# Allegro board F103CxT6MiniBoard.brd
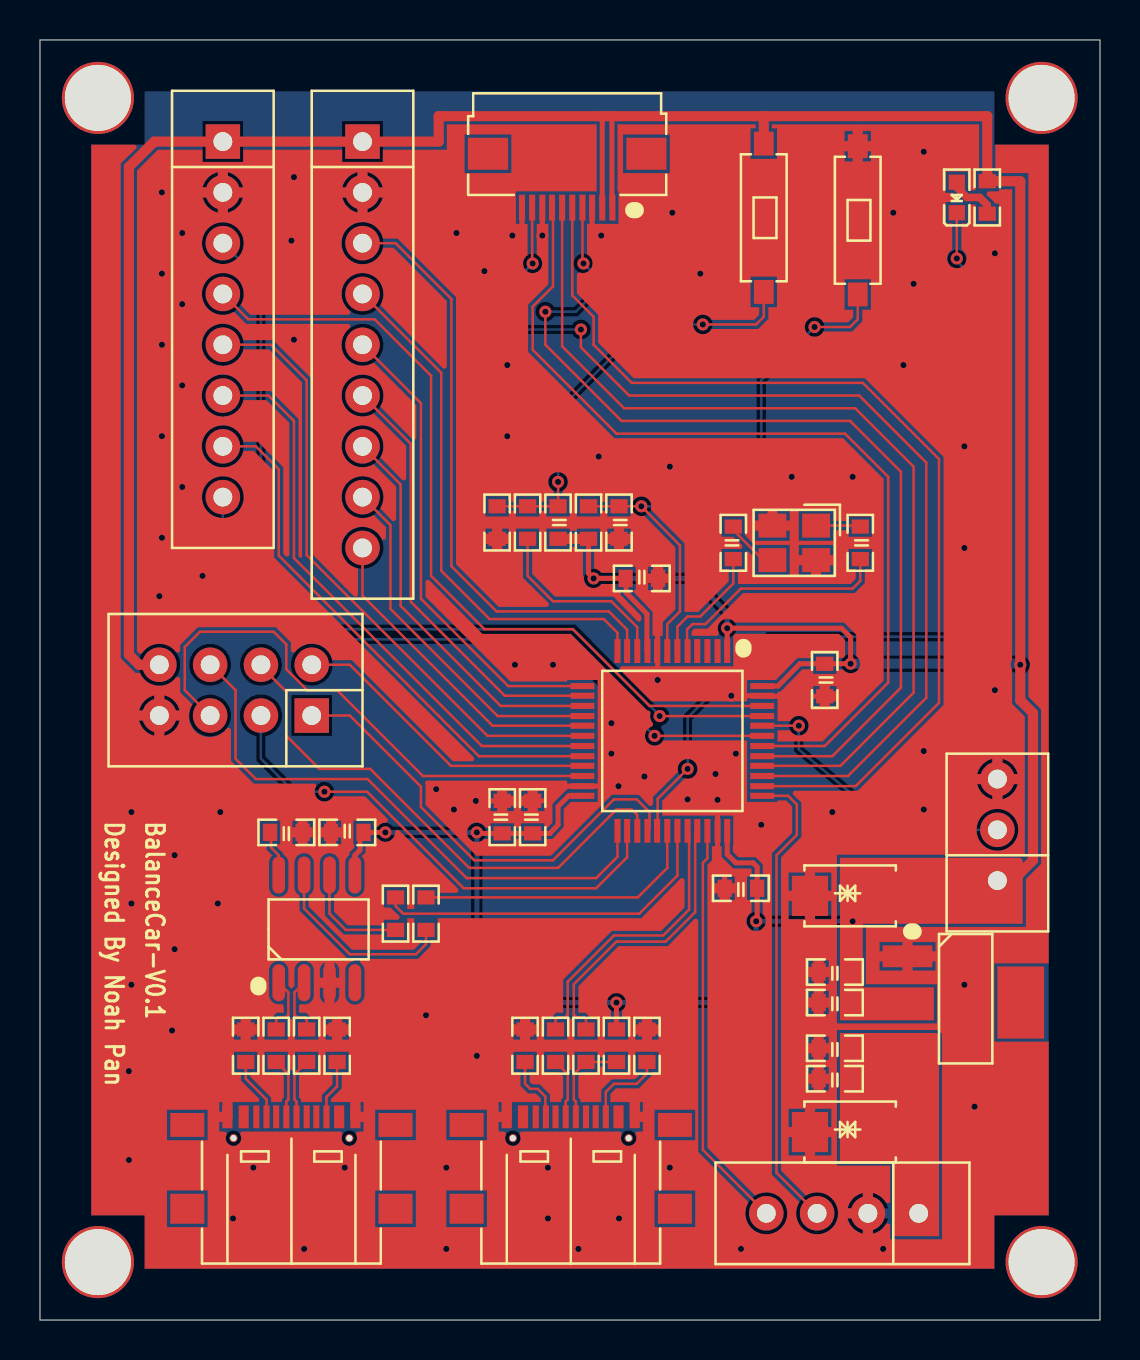
[diagram p0: board, top side]
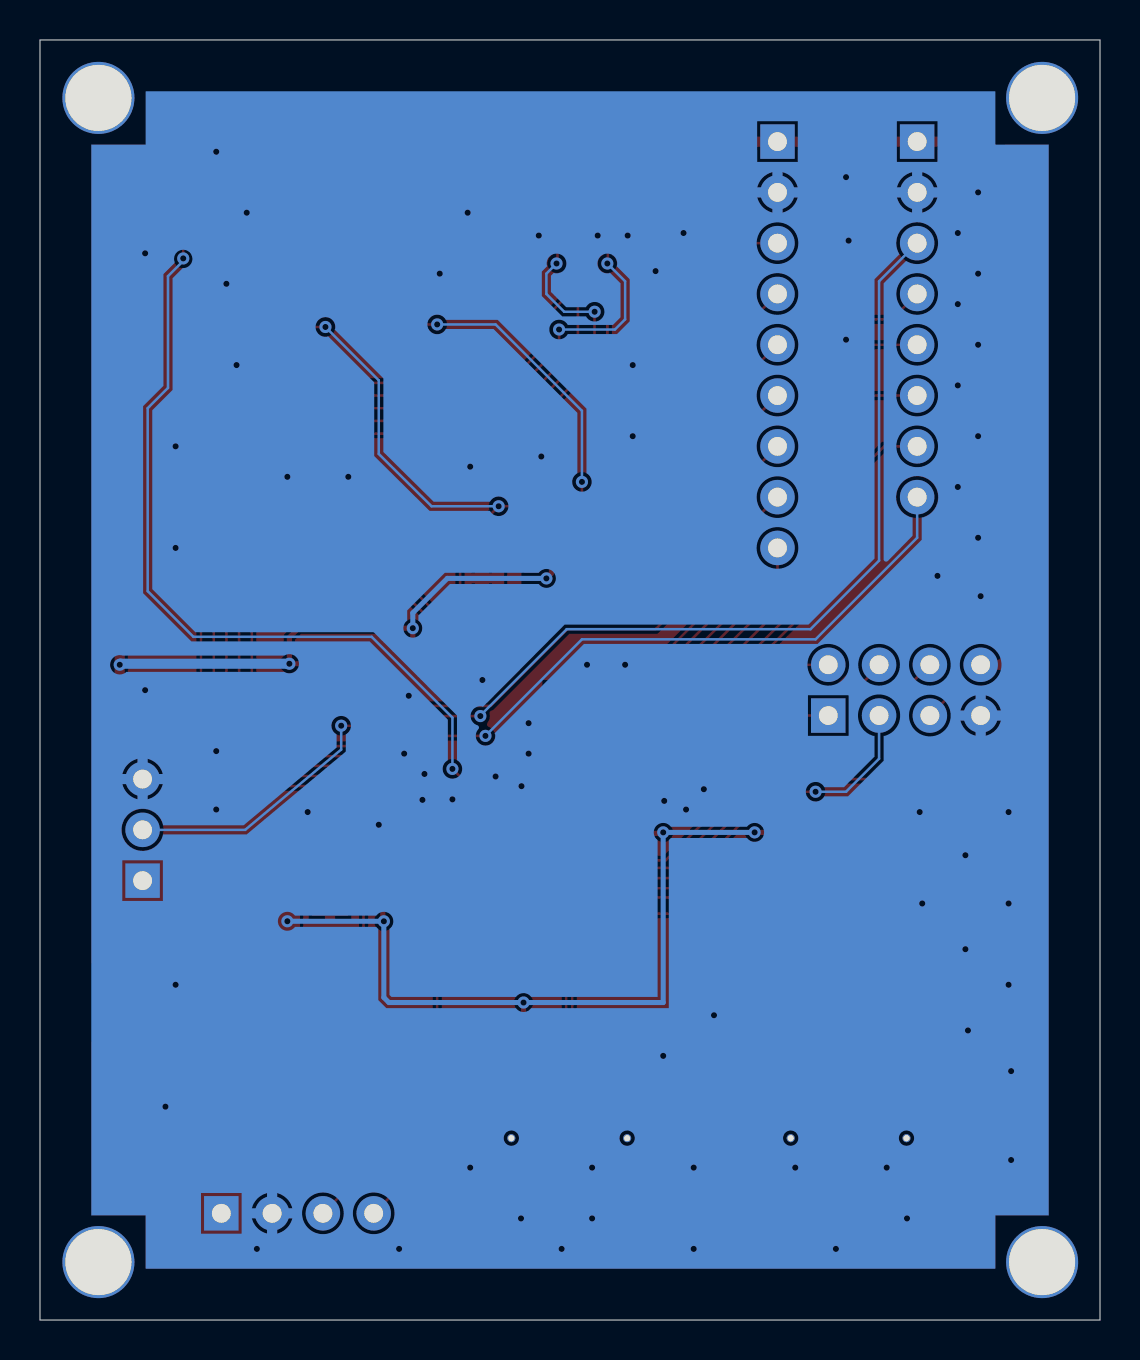
[diagram p1: board, bottom side, seen from below]

Outline 53.01 x 64.01 mm; copper layers: TOP, BOTTOM. Coordinates in mm from the lower left corner of the outline.
Outline path: 0,64.01 0,0 53.01,0 53.01,64.01 0,64.01

## Design rules (mm)
net group PA11: nets PA11 USB2_DM
net group PA12: nets PA12 USB2_DP
net group USB1_DM: nets N118345 USB1_DM
net group USB1_DP: nets N118343 USB1_DP
net group POWER: nets 3V3 5V GND

## Placement (name value [footprint] x y rotation side)
C1  100nF  [C0603]  15.37 24.38 180 top
C2  100nF  [C0603]  39.75 13.59 0 top
C3  10uF  [C0603]  39.75 12.06 0 top
C4  100nF  [C0603]  12.32 24.38 0 top
C5  10uF  [C0603]  39.75 17.4 0 top
C6  100nF  [C0603]  39.75 15.88 0 top
C9  22pF  [C0603]  34.67 38.86 270 top
C10  22pF  [C0603]  41.02 38.86 90 top
C11  100nF  [C0603]  35.05 21.59 0 top
C12  100nF  [C0603]  39.24 32 90 top
C13  100nF  [C0603]  23.11 25.15 270 top
C14  100nF  [C0603]  30.1 37.08 180 top
C15  4.7uF  [C0603]  24.64 25.15 270 top
C17  100nF  [C0603]  25.91 39.88 90 top
C18  100nF  [C0603]  28.96 39.88 90 top
D1  DIODE  [ESD5V0-SOD-323]  40.51 9.4 0 top
D2  DIODE  [ESD3V3-SOD-323]  40.51 21.21 0 top
J1  MPU6050-8P  [CON8-2R54]  9.14 58.93 270 top
J2  SWD-4P  [CON4-2R54]  43.94 5.33 180 top
J3  HEADER 9  [CON9-2R54]  16.13 58.93 270 top
J4  NRF24L01-8P  [CON4X2-2R54]  13.59 30.23 180 top
J5  HEADER 3  [CON3-2R54]  47.88 21.97 90 top
JUMP1  JUMPER  [R0603]  19.3 20.32 90 top
JUMP2  JUMPER  [R0603]  17.78 20.32 90 top
LCD1  LCD_SPI_10P  [FPC10-0R50]  26.37 55.63 180 top
LED2  BLUE  [LED0603]  45.85 56.13 90 top
NOREF  -  []  0 0 0 top
NOREF#2  -  [unnamed#2]  2.9 61.11 0 top
NOREF#3  -  [unnamed#2]  50.09 61.11 0 top
NOREF#4  -  []  53.01 0 90 top
NOREF#5  -  [unnamed#2]  2.9 2.9 0 top
NOREF#6  -  [unnamed#2]  50.09 2.9 0 top
R1  5.1K  [R0603]  14.86 13.72 90 top
R2  5.1K  [R0603]  10.29 13.72 90 top
R3  22R  [R0603]  11.81 13.72 90 top
R4  22R  [R0603]  13.34 13.72 90 top
R6  5.1K  [R0603]  30.35 13.72 90 top
R7  5.1K  [R0603]  24.26 13.72 90 top
R8  22R  [R0603]  28.83 13.72 90 top
R9  22R  [R0603]  25.78 13.72 90 top
R10  22R  [R0603]  27.3 13.72 90 top
R15  1K  [R0603]  24.38 39.88 270 top
R17  1.5K  [R0603]  47.37 56.13 270 top
R18  1K  [R0603]  22.86 39.88 270 top
R19  10K  [R0603]  27.43 39.88 270 top
SW3  BUTTON  [BUTTON-6R00X3R60]  36.2 55.12 90 top
SW4  BUTTON  [BUTTON-6R00X3R60]  40.89 54.99 90 top
U1  CH340N  [CH340N-SOP-8]  11.94 19.56 0 top
U3  STM32F103CBT6  [ST-LQFP-48]  31.62 28.96 270 top
U4  AMS1117  [AMS1117-SOT-223]  46.35 15.88 180 top
USB1  TYPE_C  [USB-C-16-SOCKET]  12.57 10.16 0 top
USB2  TYPE_C  [USB-C-16-SOCKET]  26.54 10.16 0 top
Y1  8MHz  [CRYSTAL-3225]  37.72 38.86 180 top

## Library data of the parts
C1-C6 C9-C15 C17 C18 = CAP
D1 D2 = DIODE_ZENER
J1 = HEADER 8
J2 = HEADER 4
J3 = HEADER 9
J4 = HEADER 4X2
J5 = HEADER 3
JUMP1 JUMP2 = JUMPER
LCD1 = LCD_SPI_10P
LED2 = LED
R1 R2 R6-R8 R15 R17-R19 = RES
R3 R4 R9 R10 = RES: signal model: RES_R0603_22R_22R
SW3 SW4 = BUTTON
U1 = CH340N
U3 = STM32F103CBT6
U4 = AMS1117
USB1 USB2 = TYPE_C_16P_SOCKET
Y1 = CRYSTAL_4P

## Footprints (pads in the part's own frame, mm; a bottom-side part is the same pattern mirrored in y, then rotated)
AMS1117-SOT-223
  rect 2.489x1.092 smd: 1(2.972,-2.311) 2(2.972,0) 3(2.972,2.311)
  rect 2.337x3.607 smd: 4(-2.692,0)
BUTTON-6R00X3R60
  rect 1.194x0.991 smd: 1(-3.708,0) 2(3.708,0)
C0603
  rect 0.711x0.864 smd: 1(-0.813,0) 2(0.813,0)
CH340N-SOP-8
  oval 0.635x1.854 smd: 1(0,-2.692) 2(1.27,-2.692) 3(2.54,-2.692) 4(3.81,-2.692) 5(3.81,2.692) 6(2.54,2.692) 7(1.27,2.692) 8(0,2.692)
CON3-2R54
  rect 1.727x1.727 hole 0.94: 1(0,0)
  round 1.727 hole 0.94: 2(2.54,0) 3(5.08,0)
CON4-2R54
  rect 1.727x1.727 hole 0.94: 1(0,0)
  round 1.727 hole 0.94: 2(2.54,0) 3(5.08,0) 4(7.62,0)
CON4X2-2R54
  rect 1.727x1.727 hole 0.94: 1(0,0)
  round 1.727 hole 0.94: 2(0,-2.54) 3(2.54,0) 4(2.54,-2.54) 5(5.08,0) 6(5.08,-2.54) 7(7.62,0) 8(7.62,-2.54)
CON8-2R54
  rect 1.727x1.727 hole 0.94: 1(0,0)
  round 1.727 hole 0.94: 2(2.54,0) 3(5.08,0) 4(7.62,0) 5(10.16,0) 6(12.7,0) 7(15.24,0) 8(17.78,0)
CON9-2R54
  rect 1.727x1.727 hole 0.94: 1(0,0)
  round 1.727 hole 0.94: 2(2.54,0) 3(5.08,0) 4(7.62,0) 5(10.16,0) 6(12.7,0) 7(15.24,0) 8(17.78,0) 9(20.32,0)
CRYSTAL-3225
  rect 1.397x1.194 smd: 1(-1.092,-0.864) 2(1.092,-0.864) 3(1.092,0.864) 4(-1.092,0.864)
ESD3V3-SOD-323
  rect 1.803x2.007 smd: 1(-2.007,0) 2(2.007,0)
ESD5V0-SOD-323
  rect 1.803x2.007 smd: 1(-2.007,0) 2(2.007,0)
FPC10-0R50
  rect 2.007x1.6 smd: (-3.962,-2.692) (3.962,-2.692)
  rect 0.305x1.295 smd: 1(-2.261,0) 2(-1.753,0) 3(-1.245,0) 4(-0.762,0) 5(-0.254,0) 6(0.254,0) 7(0.762,0) 8(1.245,0) 9(1.753,0) 10(2.261,0)
LED0603
  rect 0.762x0.813 smd: 1(0.762,0) 2(-0.762,0)
R0603
  rect 0.711x0.864 smd: 1(-0.813,0) 2(0.813,0)
ST-LQFP-48
  rect 1.194x0.305 smd: 1(-4.496,2.743) 2(-4.496,2.261) 3(-4.496,1.753) 4(-4.496,1.245) 5(-4.496,0.762) 6(-4.496,0.254) 7(-4.496,-0.254) 8(-4.496,-0.762) 9(-4.496,-1.245) 10(-4.496,-1.753) 11(-4.496,-2.261) 12(-4.496,-2.743) 25(4.496,-2.743) 26(4.496,-2.261) 27(4.496,-1.753) 28(4.496,-1.245) 29(4.496,-0.762) 30(4.496,-0.254) 31(4.496,0.254) 32(4.496,0.762) 33(4.496,1.245) 34(4.496,1.753) 35(4.496,2.261) 36(4.496,2.743)
  rect 0.305x1.194 smd: 13(-2.743,-4.496) 14(-2.261,-4.496) 15(-1.753,-4.496) 16(-1.245,-4.496) 17(-0.762,-4.496) 18(-0.254,-4.496) 19(0.254,-4.496) 20(0.762,-4.496) 21(1.245,-4.496) 22(1.753,-4.496) 23(2.261,-4.496) 24(2.743,-4.496) 37(2.743,4.496) 38(2.261,4.496) 39(1.753,4.496) 40(1.245,4.496) 41(0.762,4.496) 42(0.254,4.496) 43(-0.254,4.496) 44(-0.762,4.496) 45(-1.245,4.496) 46(-1.753,4.496) 47(-2.261,4.496) 48(-2.743,4.496)
unnamed#2
  round 3.607 hole 3.302: (0,0)
USB-C-16-SOCKET
  rect 1.702x1.194 smd: (-5.207,-0.406) (5.207,-0.406)
  rect 1.702x1.499 smd: (-5.207,-4.597) (5.207,-4.597)
  round 0.406 hole 0.305 unplated: (-2.896,-1.067) (2.896,-1.067)
  rect 0.508x1.143 smd: A1B12(-3.2,0) A4B9(-2.388,0) B1A12(3.2,0) B4A9(2.388,0)
  rect 0.305x1.143 smd: A5(-1.245,0) A6(-0.254,0) A7(0.254,0) A8(1.245,0) B5(1.753,0) B6(0.762,0) B7(-0.762,0) B8(-1.753,0)

## Nets
3V3: C1.1 C5.2 C6.2 C11.2 C12.2 C13.2 C14.2 C15.2 C17.1 D2.2(CATHODE) J1.1 J3.1 J4.8 J5.1 LCD1.1(3V3#1) LCD1.2(3V3#2) R8.2 R17.1 R19.2 SW3.2 U1.5(VCC) U3.1(VBAT) U3.9(VDDA) U3.24(VDD#24) U3.36(VDD#36) U3.48(VDD#48) U4.2(VOUT)
5V: C2.2 C3.2 D1.2(CATHODE) J2.1 U4.3(VIN)
GND: C1.2 C2.1 C3.1 C4.2 C5.1 C6.1 C11.1 C12.1 C13.1 C14.1 C15.1 C18.1 D1.1(ANODE) D2.1(ANODE) J1.2 J2.2 J3.2 J4.7 J5.3 LCD1.3(GND#3) LCD1.8(GND#8) LCD1.10(GND#10) R1.2 R2.2 R6.2 R7.2 R18.2 SW4.2 U1.3(GND) U3.8(VSSA) U3.23(VSS#23) U3.35(VSS#35) U3.47(VSS#47) U4.1(ADJ) USB1.A1B12(GND1) USB1.B1A12(GND2) USB2.A1B12(GND1) USB2.B1A12(GND2) Y1.2(GND1) Y1.4(GND2)
BOOT0: J5.2 U3.44(BOOT0)
HSE_IN: C10.1 U3.5(PD0/OSC_IN)
HSE_OUT: C9.2 U3.6(PD1/OSC_OUT)
KEY: R15.2 U3.10(PA0/WKUP)
LCD_BL: LCD1.7(LCD_BL) U3.42(PB6)
LCD_DC: LCD1.6(LCD_DC) U3.40(PB4)
LCD_SPI1_MOSI: LCD1.4(SPI_SDA) U3.41(PB5)
LCD_SPI1_NSS: LCD1.5(SPI_CS) U3.38(PA15)
LCD_SPI1_SCK: LCD1.9(SPI_SCL) U3.39(PB3)
LED: LED2.2(CATHODE) U3.29(PA8)
MPU6050_AD0: J1.7 U3.20(PB2)
MPU6050_I2C1_SCL: J1.3 U3.45(PB8)
MPU6050_I2C1_SDA: J1.4 U3.46(PB9)
MPU6050_INT: J1.8 U3.43(PB7)
MPU6050_XCL: J1.6 U3.19(PB1)
MPU6050_XDA: J1.5 U3.18(PB0)
NRF24L01_CE: J4.5 U3.22(PB11)
NRF24L01_IRQ: J4.2 U3.21(PB10)
NRF24L01_SPI2_MISO: J4.4 U3.27(PB14)
NRF24L01_SPI2_MOSI: J4.1 U3.28(PB15)
NRF24L01_SPI2_NSS: J4.6 U3.25(PB12)
NRF24L01_SPI2_SCK: J4.3 U3.26(PB13)
NRST: C18.2 R19.1 SW4.1 U3.7(N\R\S\T\)
PA1: J3.3 U3.11(PA1)
PA2: J3.4 U3.12(PA2)
PA3: J3.5 U3.13(PA3)
PA4: J3.6 U3.14(PA4)
PA5: J3.7 U3.15(PA5)
PA6: J3.8 U3.16(PA6)
PA7: J3.9 U3.17(PA7)
PA9: JUMP1.2 U3.30(PA9)
PA10: JUMP2.2 U3.31(PA10)
PA11: R9.2 U3.32(PA11)
PA12: R10.2 U3.33(PA12)
SWCLK: J2.3 U3.37(PA14)
SWDIO: J2.4 U3.34(PA13)
USART1_RXD: JUMP1.1 U1.7(RXD)
USART1_TXD: JUMP2.1 U1.6(TXD)
USB1_DM: R3.1 USB1.A6(DP1)
USB1_DP: R4.1 USB1.A7(DN1)
USB2_DM: R9.1 USB2.A6(DP1)
USB2_DP: R8.1 R10.1 USB2.A7(DN1)
N18222: C9.1 Y1.3(OUT)
N18226: C10.2 Y1.1(IN)
N28479: C4.1 U1.8(V3)
N31448: R2.1 USB1.A5(CC1)
N32610: R1.1 USB1.B5(CC2)
N49455: R7.1 USB2.A5(CC1)
N49491: R6.1 USB2.B5(CC2)
N75795: C17.2 R15.1 R18.1 SW3.1
N99846: LED2.1(ANODE) R17.2
N118343: R4.2 U1.2(UD-)
N118345: R3.2 U1.1(UD+)

Pads without a net: U1 4; U3 2 3 4; U4 4; USB1 A4B9 A8 B4A9 B6 B7 B8; USB2 A4B9 A8 B4A9 B6 B7 B8

## Via types
v1: diameter 0.61, hole 0.305, TOP to BOTTOM, 104 vias

## Routing (per net, layer and track width the routed paths; a pad name or vN(x,y) marks a point on that pad's centre or on a via; arc(x,y) is an arc through that point)
3V3: length 215.5
  TOP w0.254: v1(17.27,24.38) C1.1 16,24.21 16,23.5 15.75,23.24 U1.5 ; LCD1.1 28.6,55.65 28.6,60.2 ; U3.9 30.35,33.48 30.35,35.31 29.31,36.37 29.31,37.08 C14.2 v1(27.69,37.08) 27.43,37.34 R19.2 ; U3.1 v1(34.37,34.59) 40.08,34.59 40.54,34.14 v1(40.54,32.82) C12.2 38,32.82 36.91,31.7 U3.48 ; LCD1.2 28.12,60.15 28.07,60.2 ; v1(21.84,24.38) 21.89,24.33 C13.2 C15.2 25.5,24.33 25.91,24.77 25.91,25.68 26.44,26.21 U3.24 ; R8.2 v1(28.83,15.88) ; U3.36 34.37,23.29 34.8,22.86 35.66,22.86 35.86,22.66 C11.2 35.86,19.99 v1(35.81,19.94)
  TOP w0.508: SW3.2 36.2,60.2 ; 36.2,60.2 19.94,60.2 19.94,58.93 J3.1 J1.1 5.71,58.93 4.45,57.66 4.45,33.27 4.95,32.77 J4.8 ; 36.2,60.2 47.37,60.2 47.37,57.07 47.5,56.95 ; 47.5,56.95 R17.1 ; 47.5,56.95 49.02,56.95 v1(49.02,32.77) 49.02,30.99 49.66,30.35 49.66,22.99 48.51,21.84 47.88,21.84 J5.1 ; C17.1 R19.2
  BOTTOM w0.254: v1(17.27,24.38) v1(21.84,24.38) 21.84,15.88 v1(28.83,15.88) 35.56,15.88 35.81,16.13 v1(35.81,19.94) v1(40.64,19.94) ; v1(34.37,34.59) 34.37,35.36 32.64,37.08 v1(27.69,37.08)
  BOTTOM w0.508: v1(40.54,32.82) 48.97,32.82 v1(49.02,32.77)
GND: length 134.9
  TOP w0.254: C13.1 v1(21.79,25.96) ; LCD1.8 v1(25.12,54.23) ; v1(33.88,26.01) U3.35 33.88,22.76 34.24,22.4 C11.1 ; C15.1 25.45,25.96 26.19,26.7 U3.23 v1(28.93,26.7) ; C14.1 30.89,37.06 30.89,33.45 ; 30.89,33.45 U3.8 ; 30.89,33.45 v1(30.89,32) ; v1(28.07,54.23) 27.61,54.69 LCD1.3 ; v1(23.62,54.23) 24.1,54.71 LCD1.10 ; C12.1 36.14,31.19 U3.47 v1(34.57,31.22)
  TOP w0.508: 14.55,23.75 C1.2 ; C1.2 15.11,24.38 ; C1.2 14,24.38 ; C1.2 14.55,25.02 ; 41.94,18.19 U4.1 ; U4.1 43.38,18.95 ; U4.1 43.38,17.42 ; U4.1 44.83,18.19 ; 24,25.96 C15.1 ; C15.1 24.64,26.52 ; C15.1 24.64,25.4 ; 38.94,12.95 C2.1 ; C2.1 39.5,13.59 ; C2.1 38.94,14.22 ; C2.1 38.38,13.59 ; 15.06,56.39 J3.2 ; J3.2 17.2,56.39 ; J3.2 16.13,57.45 ; J3.2 16.13,55.32 ; R1.2 15.49,14.53 ; R1.2 14.86,15.09 ; R1.2 14.22,14.53 ; R1.2 14.86,13.97 ; C12.1 39.88,31.19 ; C12.1 39.24,30.63 ; C12.1 39.24,31.75 ; Y1.2 37.54,39.73 ; Y1.2 36.63,40.54 ; Y1.2 35.71,39.73 ; 38.81,37.19 Y1.4 ; Y1.4 39.73,38 ; Y1.4 37.9,38 ; 8.92,10.16 USB1.A1B12 9.37,10.95 ; SW4.2 40.89,59.51 ; SW4.2 40.18,58.7 ; SW4.2 40.89,57.89 ; SW4.2 41.61,58.7 ; J2.2 41.4,6.4 ; J2.2 40.34,5.33 ; J2.2 41.4,4.27 ; 24.26,13.97 R7.2 ; R7.2 24.89,14.53 ; R7.2 24.26,15.09 ; R7.2 23.62,14.53 ; 12.57,24.38 C4.2 ; C4.2 13.69,24.38 ; C4.2 13.13,25.02 ; C4.2 13.13,23.75 ; 22.23,39.07 R18.2 ; R18.2 22.86,39.62 ; R18.2 23.5,39.07 ; R18.2 22.86,38.51 ; J5.3 47.88,28.12 ; J5.3 47.88,25.98 ; J5.3 46.81,27.05 ; J5.3 48.95,27.05 ; 38.38,12.06 C3.1 ; C3.1 38.94,12.7 ; C3.1 38.94,11.43 ; C3.1 39.5,12.06 ; 4.9,30.23 J4.7 ; J4.7 7.04,30.23 ; J4.7 5.97,31.29 ; J4.7 5.97,29.16 ; 9.65,14.53 R2.2 ; R2.2 10.29,15.09 ; R2.2 10.92,14.53 ; R2.2 10.29,13.97 ; 38.38,15.88 C6.1 ; C6.1 38.94,16.51 ; C6.1 39.5,15.88 ; C6.1 38.94,15.24 ; 29.72,14.53 R6.2 ; R6.2 30.35,15.09 ; R6.2 30.35,13.97 ; R6.2 30.99,14.53 ; C18.1 29.59,39.07 ; C18.1 28.96,38.51 ; C18.1 28.96,39.62 ; C18.1 28.32,39.07 ; 9.14,55.32 J1.2 ; J1.2 8.08,56.39 ; J1.2 10.21,56.39 ; J1.2 9.14,57.45 ; 29.74,10.95 USB2.B1A12 30.2,10.16 ; U1.3 14.48,18.01 ; U1.3 13.94,16.87 ; U1.3 14.48,15.72 ; U1.3 15.01,16.87 ; 37.39,9.4 D1.1 ; D1.1 38.51,10.62 ; D1.1 38.51,8.18 ; D1.1 39.62,9.4 ; 22.89,10.16 USB2.A1B12 23.34,10.95 ; C5.1 38.94,18.03 ; C5.1 38.38,17.4 ; C5.1 38.94,16.76 ; C5.1 39.5,17.4 ; C13.1 23.11,26.52 ; C13.1 23.75,25.96 ; C13.1 23.11,25.4 ; C11.1 34.8,21.59 ; C11.1 33.68,21.59 ; C11.1 34.24,20.95 ; 37.39,21.21 D2.1 ; D2.1 38.51,22.43 ; D2.1 39.62,21.21 ; D2.1 38.51,19.99 ; 16.23,10.16 USB1.B1A12 15.77,10.95 ; 30.91,36.45 C14.1 ; C14.1 31.47,37.08 ; C14.1 30.91,37.72 ; C14.1 30.35,37.08
  BOTTOM w0.508: J2.2 41.4,6.4 ; J2.2 41.4,4.27 ; J2.2 42.47,5.33 ; J2.2 40.34,5.33 ; J5.3 47.88,28.12 ; J5.3 46.81,27.05 ; J5.3 48.95,27.05 ; J5.3 47.88,25.98 ; J3.2 17.2,56.39 ; J3.2 15.06,56.39 ; J3.2 16.13,55.32 ; J3.2 16.13,57.45 ; J4.7 5.97,31.29 ; J4.7 5.97,29.16 ; J4.7 7.04,30.23 ; J4.7 4.9,30.23 ; 8.08,56.39 J1.2 ; J1.2 10.21,56.39 ; J1.2 9.14,57.45 ; J1.2 9.14,55.32
  vias: v1(4.45,12.45) v1(4.45,8) v1(4.57,25.4) v1(4.57,20.83) v1(4.57,16.76) v1(5.97,36.2) v1(6.1,56.39) v1(6.1,52.32) v1(6.1,48.77) v1(6.1,44.2) v1(6.1,39.12) v1(6.6,14.48) v1(6.73,23.24) v1(6.73,18.54) v1(7.11,54.36) v1(7.11,50.8) v1(7.11,46.74) v1(7.11,41.66) v1(8.13,37.21) v1(8.89,20.83) v1(9.02,25.4) v1(9.65,5.08) v1(10.67,7.62) v1(12.57,53.98) v1(12.7,57.15) v1(12.7,49.02) v1(13.21,3.56) v1(15.24,7.62) v1(19.3,15.24) v1(19.81,26.54) v1(20.32,7.62) v1(20.32,3.56) v1(20.7,25.53) v1(20.83,54.36) v1(21.84,13.21) v1(22.23,52.45) v1(23.37,47.75) v1(23.37,44.2) v1(23.75,32.77) v1(25.4,7.62) v1(25.4,5.08) v1(25.65,32.77) v1(26.92,3.56) v1(27.94,43.18) v1(28.57,29.84) v1(28.57,28.32) v1(28.96,5.08) v1(30.23,27.18) v1(31.5,42.67) v1(31.5,7.62) v1(31.62,55.37) v1(32.38,26.04) v1(33.02,52.32) v1(33.78,27.3) v1(34.8,28.32) v1(35.05,3.56) v1(36.07,24.77) v1(37.59,42.16) v1(39.62,25.4) v1(40.64,42.16) v1(42.16,3.56) v1(42.67,55.37) v1(43.18,47.75) v1(43.69,51.82) v1(44.2,58.42) v1(44.2,28.45) v1(44.2,25.53) v1(46.23,43.69) v1(46.23,38.61) v1(46.23,16.76) v1(46.74,10.67) v1(47.75,53.34) v1(47.75,31.5)
BOOT0: length 14.4
  TOP w0.127: U3.44 v1(37.95,29.72)
  BOTTOM w0.127: J5.2 42.75,24.51 37.95,28.52 v1(37.95,29.72)
HSE_IN: length 11.9
  TOP w0.127: C10.1 41.02,36.96 40.64,36.58 35.05,36.58 33.27,34.8 32.64,34.8 32.36,34.54 32.36,33.45 U3.5
HSE_OUT: length 6.1
  TOP w0.127: 31.88,33.45 31.88,34.67 32.38,35.18 33.02,35.18 34.67,36.83 C9.2
KEY: length 9.6
  TOP w0.127: R15.2 24.38,37.21 25.65,35.94 28.57,35.94 29.87,34.65 U3.10
LCD_BL: length 45.9
  TOP w0.127: U3.42 39.24,28.7 42.42,31.88 42.42,42.16 40.26,44.32 28.83,44.32 24.64,48.51 24.64,50.67 25.65,51.69 25.65,55.58 LCD1.7
LCD_DC: length 47.4
  TOP w0.127: U3.40 40.03,27.71 43.69,31.37 43.69,42.67 40.77,45.59 29.21,45.59 26.11,48.69 LCD1.6
LCD_SPI1_MOSI: length 48.5
  TOP w0.127: LCD1.4 27.13,52.88 v1(27.18,52.83) ; v1(25.27,50.42) 25.27,48.77 29.08,44.96 40.51,44.96 43.05,42.42 43.05,31.62 39.62,28.19 U3.41
  BOTTOM w0.127: v1(25.27,50.42) 26.8,50.42 27.69,51.31 27.69,52.32 v1(27.18,52.83)
LCD_SPI1_NSS: length 49.7
  TOP w0.127: LCD1.5 26.62,51.23 27.69,50.16 27.69,48.77 29.59,46.86 41.15,46.86 44.96,43.05 44.96,30.86 40.79,26.7 U3.38
LCD_SPI1_SCK: length 51.6
  TOP w0.127: LCD1.9 24.61,52.86 v1(24.64,52.83) ; v1(27.05,49.53) 27.05,48.64 29.46,46.23 40.97,46.23 44.32,42.88 44.32,31.11 40.41,27.2 U3.39
  BOTTOM w0.127: v1(27.05,49.53) 24.26,49.53 23.75,50.04 23.75,51.94 v1(24.64,52.83)
LED: length 43.8
  TOP w0.127: U3.29 30.89,24.46 30.89,26.06 v1(32.38,27.56) ; v1(45.85,53.09) LED2.2
  BOTTOM w0.127: v1(45.85,53.09) 45.85,52.96 46.61,52.2 46.61,46.61 47.62,45.59 47.62,36.45 45.34,34.16 36.42,34.16 32.38,30.12 v1(32.38,27.56)
MPU6050_AD0: length 26.9
  TOP w0.127: U3.20 21.95,28.19 11.94,38.23 11.94,42.55 10.79,43.69 J1.7
MPU6050_I2C1_SCL: length 45
  TOP w0.127: U3.45 v1(30.99,30.2)
  BOTTOM w0.127: J1.3 11.05,51.94 11.05,37.97 14.48,34.54 26.67,34.54 30.99,30.23 v1(30.99,30.2)
MPU6050_I2C1_SDA: length 41.4
  TOP w0.127: U3.46 30.48,30.71 26.64,34.54 22.23,34.54 19.56,37.21 19.56,47.22 16.74,50.04 10.41,50.04 J1.4
MPU6050_INT: length 33.1
  TOP w0.127: U3.43 v1(30.73,29.21)
  BOTTOM w0.127: v1(30.73,29.21) 25.91,34.04 14.22,34.04 9.14,39.12 J1.8
MPU6050_XCL: length 29.3
  TOP w0.127: J1.6 11.43,46.23 12.7,44.96 12.7,38.1 22.1,28.7 U3.19
MPU6050_XDA: length 31.2
  TOP w0.127: J1.5 11.56,48.77 13.34,46.99 13.34,38.25 22.38,29.21 U3.18
NRF24L01_CE: length 27.9
  TOP w0.127: U3.22 19.15,27.2 14.86,31.5 13.36,31.5 12.32,32.54 12.32,33.78 11.68,34.42 8,34.42 7.24,33.66 7.24,31.5 J4.5
NRF24L01_IRQ: length 15.6
  TOP w0.127: U3.21 20.55,27.71 15.49,32.77 J4.2
NRF24L01_SPI2_MISO: length 26.5
  TOP w0.127: U3.27 29.87,25.25 29.59,25.53 28.83,25.53 25.91,22.61 21.46,22.61 16.51,27.56 13.97,27.56 12.32,29.21 12.32,31.42 11.05,32.69 J4.4
NRF24L01_SPI2_MOSI: length 23
  TOP w0.127: J4.1 15.49,30.23 19.05,26.67 19.05,25.65 21.72,22.99 25.65,22.99 28.7,26.04 29.84,26.04 30.48,25.4 30.48,24.56 U3.28
NRF24L01_SPI2_NSS: length 28.5
  TOP w0.127: U3.25 28.88,23.16 27.81,22.1 21.34,22.1 16.38,27.05 10.79,27.05 9.78,28.07 9.78,31.5 J4.6
NRF24L01_SPI2_SCK: length 25.1
  TOP w0.127: U3.26 29.36,23.14 27.81,21.59 21.18,21.59 16.36,26.42 v1(14.22,26.42)
  BOTTOM w0.127: J4.3 11.05,28.07 12.7,26.42 v1(14.22,26.42)
NRST: length 29
  TOP w0.127: SW4.1 40.89,50.04 40.51,49.66 v1(38.73,49.66) ; U3.7 31.37,34.8 32,35.43 32,38.73 v1(30.07,40.69) C18.2 R19.1
  BOTTOM w0.127: v1(38.73,49.66) 36.07,46.99 36.07,43.31 33.43,40.69 v1(30.07,40.69)
PA1: length 30.1
  TOP w0.127: J3.3 17.78,53.85 20.57,51.05 20.57,37.69 22.83,35.43 28.45,35.43 29.36,34.52 U3.11
PA2: length 26.5
  TOP w0.127: U3.12 28.88,34.37 28.19,35.05 22.48,35.05 20.07,37.47 20.07,47.37 J3.4
PA3: length 23.8
  TOP w0.127: J3.5 19.05,45.85 19.05,36.07 23.42,31.7 U3.13
PA4: length 21.8
  TOP w0.127: J3.6 18.54,43.81 18.54,35.92 23.24,31.22 U3.14
PA5: length 19.9
  TOP w0.127: U3.15 23.04,30.71 18.03,35.71 18.03,41.78 J3.7
PA6: length 18
  TOP w0.127: J3.8 17.53,39.75 17.53,35.56 22.89,30.2 U3.16
PA7: length 16.1
  TOP w0.127: J3.9 16.13,36.22 22.63,29.72 U3.17
PA9: length 14.5
  TOP w0.127: JUMP1.2 29.9,21.13 31.37,22.61 U3.30
PA10: length 17.7
  TOP w0.127: JUMP2.2 17.78,20.7 18.16,20.32 29.97,20.32 31.88,22.23 31.88,24.46
PA11: length 14.4
  TOP w0.127: R9.2 25.78,15.01 25.91,15.14 26.26,15.14 26.39,15.27 26.39,16.92 28.7,19.23 31.17,19.23 32.46,20.52 32.46,24.36 32.36,24.43 32.36,24.46 U3.32
PA12: length 14.4
  TOP w0.127: U3.33 32.77,24.36 32.77,20.4 31.29,18.92 28.83,18.92 26.7,16.79 26.7,15.27 26.82,15.14 27.18,15.14 27.3,15.01 R10.2
SWCLK: length 23.6
  TOP w0.127: J2.3 36.83,7.37 36.83,23.24 37.85,24.26 37.85,25.78 37.41,26.21 U3.37
SWDIO: length 20.5
  TOP w0.127: U3.34 33.38,23.09 33.15,22.86 33.15,8.51 J2.4
USART1_RXD: length 9.6
  TOP w0.127: JUMP1.1 19.3,18.8 18.8,18.29 15.49,18.29 13.21,20.57 U1.7
USART1_TXD: length 5.6
  TOP w0.127: U1.6 14.48,20.32 15.29,19.51 JUMP2.1
USB1_DM: length 3
  TOP w0.127: R3.1 12.42,12.29 12.42,11.02 12.32,10.92 USB1.A6
USB1_DP: length 3
  TOP w0.127: USB1.A7 12.83,10.92 12.73,11.02 12.73,12.29 R4.1
USB2_DM: length 3
  TOP w0.127: USB2.A6 26.29,10.92 26.39,11.02 26.39,12.29 R9.1
USB2_DP: length 4.6
  TOP w0.127: R8.1 R10.1 26.7,12.29 26.7,11.02 26.8,10.92 USB2.A7
N18222: length 2.8
  TOP w0.127: C9.1 34.67,39.5 36.17,38 Y1.3
N18226: length 2.2
  TOP w0.127: Y1.1 40.97,39.73 C10.2
N28479: length 2.3
  TOP w0.127: C4.1 11.56,24.33 11.56,23.62 11.94,23.24 U1.8
N31448: length 3.2
  TOP w0.127: USB1.A5 11.33,11.02 10.29,12.06 R2.1
N32610: length 3
  TOP w0.127: R1.1 14.86,11.68 14.33,11.15 USB1.B5
N49455: length 3.4
  TOP w0.127: R7.1 24.26,11.81 24.51,11.56 24.89,11.56 25.27,11.18 25.27,10.19 USB2.A5
N49491: length 4.3
  TOP w0.127: R6.1 30.35,12.32 29.84,11.81 28.7,11.81 28.3,11.4 USB2.B5
N75795: length 21.3
  TOP w0.127: v1(25.91,41.91) C17.2 R15.1 R18.1 ; SW3.1 36.2,50.16 35.81,49.78 v1(33.15,49.78)
  BOTTOM w0.127: v1(25.91,41.91) 25.91,45.47 30.23,49.78 v1(33.15,49.78)
N99846: length 2.6
  TOP w0.381: R17.2 47.37,55.75 46.99,56.13 46.35,56.13 45.85,56.64 LED2.1
N118343: length 3
  TOP w0.127: R4.2 13.34,15.01 13.21,15.14 12.85,15.14 12.73,15.27 12.73,16.38 U1.2
N118345: length 3
  TOP w0.127: U1.1 12.42,16.38 12.42,15.27 12.29,15.14 11.94,15.14 11.81,15.01 R3.2

## Copper pours and planes (outline as drawn; the poured copper is in the pictures)
3V3 on TOP (solid shape): 49.15,22.99 49.15,19.81 41.15,19.81 41.15,16.64 44.7,16.64 44.7,14.99 40.01,14.99 40.01,23.11 49.02,23.11
5V on TOP (solid shape): 44.96,14.22 44.96,4.19 42.67,4.19 42.67,7.87 40.01,7.87 40.01,14.35 44.83,14.35
GND on TOP (solid shape): 40.26,34.01 40.26,33.2 40.2,33.15 40.16,33.1 39.83,33.1 39.83,33.32 38.66,33.32 38.66,33.1 37.87,33.1 36.8,32 35.36,32 35.36,30.94 30.58,30.94 29.03,32.49 29.01,32.6 29.11,32.69 34.67,32.69 34.67,34.21 34.71,34.26 34.75,34.32 39.95,34.32
GND on TOP (solid shape): outline of 1745 points within 4.85,27.94 42.19,59.79
GND on TOP (solid shape): outline of 2300 points within 2.57,2.57 50.44,59.79
GND on BOTTOM (solid shape): outline of 3238 points within 2.57,2.57 50.44,61.44

## Text on the board
Ref Des/Silkscreen Top: Designed By Noah Pan | BalanceCar-V0.1
DIMENSION: FIGURE | SIZE | 12.0 | 37.0 | 129.902 | 11.799 | DRILL CHART: TOP to BOTTOM | ALL UNITS ARE IN MILS | PLATED | NON-PLATED | QTY | 101 | 32 | 4
